# EAGLE board main_v3 (EAGLE 6.3)

Size 103.81 x 81.27 mm. Coordinates in mm from the lower left corner, seen from the top.
Outline: 0,0 103.81,0 103.81,81.27 0,81.27 0,0
Copper layers (1*16): Top 0.035mm / dielectric 1.5mm / Bottom 0.035mm
Design rules "default": minimum track width 10mil, minimum drill 24mil, track to track 8mil, track to pad 8mil, pad to pad 8mil, via to via 8mil, smd to smd 8mil, copper to edge 40mil, drill to drill 8mil, minimum pad ring 10mil, minimum via ring 8mil, stop-mask expansion 4mil, vias tented up to drill 0mil, thermal gap 10mil

## Footprints (pad centres in the part's own frame; a part is rotated, then mirrored left to right if it is on the bottom)
SA56-11 = drill 0.8 long: 1 -5.08,-7.62; 2 -2.54,-7.62; 3 0,-7.62; 4 2.54,-7.62; 5 5.08,-7.62; 6 5.08,7.62; 7 2.54,7.62; 8 0,7.62; 9 -2.54,7.62; 10 -5.08,7.62
R0805 = smd 1.3 x 1.5: 1 -0.85,0; 2 0.85,0
MA04-1 = drill 1.016 long: 1 -3.81,0; 2 -1.27,0; 3 1.27,0; 4 3.81,0
DIP254P762X508-16 = drill 1.118 square: 1 -7.62,17.78 | drill 1.118: 2 -7.62,15.24; 3 -7.62,12.7; 4 -7.62,10.16; 5 -7.62,7.62; 6 -7.62,5.08; 7 -7.62,2.54; 8 -7.62,0; 9 0,0; 10 0,2.54; 11 0,5.08; 12 0,7.62; 13 0,10.16; 14 0,12.7; 15 0,15.24; 16 0,17.78

## Placement (x,y rotation side)
LED1  7-SEG_SA56-11  [SA56-11]  45.72,48.26 0 bottom
LED2  7-SEG_SA56-11  [SA56-11]  58.42,48.26 0 bottom
R1  220  [R0805]  67.31,55.88 180 top
R2  220  [R0805]  67.31,53.34 180 top
R3  220  [R0805]  67.31,40.64 180 top
R4  220  [R0805]  60.96,43.18 180 top
R5  220  [R0805]  54.61,44.45 270 top
R6  220  [R0805]  54.61,52.07 90 top
R7  220  [R0805]  58.42,52.07 90 top
R8  220  [R0805]  49.53,52.07 90 top
R9  220  [R0805]  45.72,53.34 0 top
R10  220  [R0805]  49.53,44.45 270 top
R11  220  [R0805]  45.72,43.18 0 top
R12  220  [R0805]  38.1,41.91 90 top
R13  220  [R0805]  38.1,54.61 90 top
R14  220  [R0805]  41.91,52.07 90 top
R15  10K  [R0805]  81.28,36.83 180 top
R16  10K  [R0805]  24.13,36.83 180 top
R17  10K  [R0805]  71.12,34.29 90 top
SV1  +5, 0, clock, reset  [MA04-1]  25.4,30.48 180 top
U1  CD4026BE  [DIP254P762X508-16]  33.02,39.37 0 top
U2  CD4026BE  [DIP254P762X508-16]  72.39,57.15 180 top

## Library data of the parts
LED1 LED2 = display-kingbright; OC_FARNELL: unknown; OC_NEWARK: unknown
R1-R17 = resistor
SV1 = con-lstb; OC_FARNELL: unknown; OC_NEWARK: unknown
U1 U2 = Texas Instruments_By_element14_Batch_1; MPN: CD4026BE; OC_FARNELL: 1703295; OC_NEWARK: 64K3092; PACKAGE: 16-DIP; SUPPLIER: Texas Instruments

## Nets
+5V: SV1.1 U1.3 U1.16 U2.3 U2.16
GND: LED1.3 LED1.8 LED2.3 LED2.8 R15.1 R16.1 R17.1 SV1.4 U1.2 U1.8 U2.2 U2.8
N$1: LED2.10 R1.2
N$2: LED2.9 R2.2
N$3: LED2.1 R3.2
N$4: LED2.2 R4.2
N$5: LED2.4 R5.2
N$6: LED2.6 R6.2
N$7: LED2.7 R7.2
N$8: R7.1 U2.10
N$9: R6.1 U2.12
N$10: LED1.10 R8.2
N$11: LED1.9 R9.2
N$12: LED1.1 R10.2
N$13: LED1.2 R11.2
N$14: LED1.4 R12.2
N$15: LED1.6 R13.2
N$16: LED1.7 R14.2
N$17: R5.1 U2.13
N$18: R3.1 U2.11
N$19: R2.1 U2.6
N$20: R1.1 U2.7
N$21: R14.1 U1.10
N$22: R13.1 U1.12
N$23: R12.1 U1.13
N$24: R11.1 U1.9
N$25: R10.1 U1.11
N$27: R4.1 U2.9
N$28: R9.1 U1.6
N$29: R8.1 U1.7
N$30: R16.2 SV1.3 U1.1
N$31: R15.2 U1.5 U2.1
N$32: R17.2 SV1.2 U1.15 U2.15

## Tracks (layer width: path | path; a pad name or v marks a point on that pad's centre or on a via)
+5V  (4 unrouted)
GND  (11 unrouted)
N$1  (1 unrouted)
N$2  (1 unrouted)
N$3  (1 unrouted)
N$4  (1 unrouted)
N$5  (1 unrouted)
N$6  (1 unrouted)
N$7  (1 unrouted)
N$8  (1 unrouted)
N$9  (1 unrouted)
N$10  (1 unrouted)
N$11  (1 unrouted)
N$12  (1 unrouted)
N$13  (1 unrouted)
N$14  (1 unrouted)
N$15  (1 unrouted)
N$16  (1 unrouted)
N$17  (1 unrouted)
N$18  (1 unrouted)
N$19  (1 unrouted)
N$20  (1 unrouted)
N$21  (1 unrouted)
N$22  (1 unrouted)
N$23  (1 unrouted)
N$24  (1 unrouted)
N$25  (1 unrouted)
N$27  (1 unrouted)
N$28  (1 unrouted)
N$29  (1 unrouted)
N$30  (2 unrouted)
N$31  (2 unrouted)
N$32  (3 unrouted)